# EAGLE board RM Turing_mini_expander (EAGLE 7.5.0)
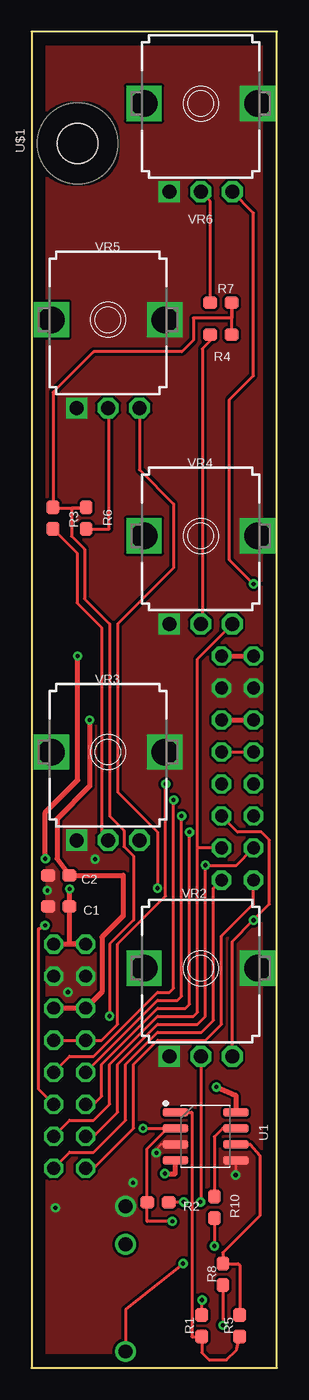
[diagram p0: board, top side]
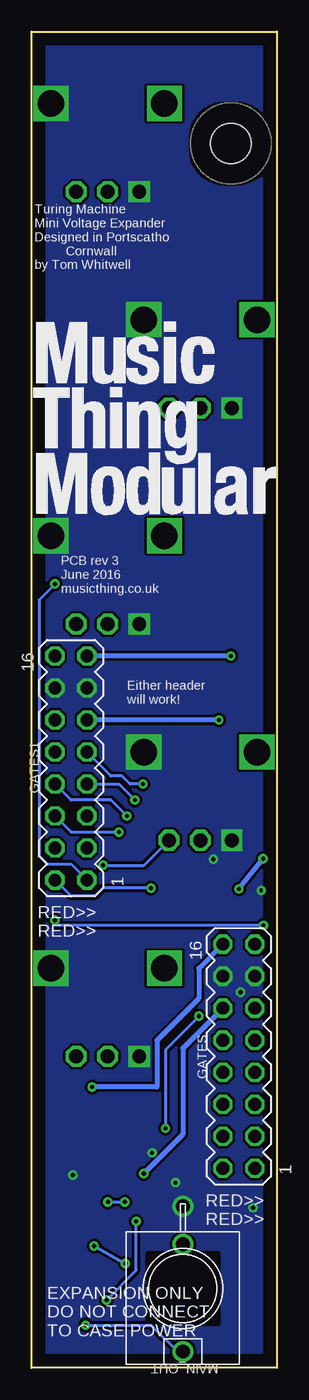
[diagram p1: board, bottom side, seen from below]

Size 19.5 x 106 mm. Coordinates in mm from the lower left corner, seen from the top.
Outline: 0,0 19.5,0 19.5,106 0,106 0,0
Outline: 0,0 0,0
Copper layers (1*16): Top 0.035mm / dielectric 0.2mm / Bottom 0.018mm
Design rules "default *": minimum track width 10mil, minimum drill 0.61mm, track to track 8mil, track to pad 8mil, pad to pad 8mil, via to via 8mil, smd to smd 8mil, copper to edge 40mil, drill to drill 8mil, minimum pad ring 0mil, minimum via ring 8mil, stop-mask expansion 2mil, vias tented up to drill 13mil, thermal gap 10mil
Net classes: 0 default: width 0.203 mm, clearance 0.152 mm, clearance 0.152 mm to class 1, clearance 0.152 mm to class 2; 1 power: width 0.203 mm, clearance 0.152 mm, clearance 0.152 mm to class 0, clearance 0.152 mm to class 2; 2 ground: width 0.203 mm, clearance 0.152 mm, clearance 0.152 mm to class 0, clearance 0.152 mm to class 1

## Footprints (pad centres in the part's own frame; a part is rotated, then mirrored left to right if it is on the bottom)
CAP_0603 = smd 1.1 x 1: 1 -0.85,0; 2 0.85,0
MA08-2 = drill 1.016 pad 1.524 octagon: 1 -8.89,-1.27; 2 -8.89,1.27; 3 -6.35,-1.27; 4 -6.35,1.27; 5 -3.81,-1.27; 6 -3.81,1.27; 7 -1.27,-1.27; 8 -1.27,1.27; 9 1.27,-1.27; 10 1.27,1.27; 11 3.81,-1.27; 12 3.81,1.27; 13 6.35,-1.27; 14 6.35,1.27; 15 8.89,-1.27; 16 8.89,1.27
WQP-PJ301M-12_JACK = drill 1.1 pad 1.65: P$1_TIP 0,5; P$2_SWITCH 0,-3.5; P$3_SLEEVE 0,-6.5
RES_0603 = smd 1.1 x 1: 1 -0.85,0; 2 0.85,0
SOIC8P127_490X600X175L83X41N_AD8 = smd 0.66 x 2: 1 -1.905,-2.405; 2 -0.635,-2.405; 3 0.635,-2.405; 4 1.905,-2.405; 5 1.905,2.405; 6 0.635,2.405; 7 -0.635,2.405; 8 -1.905,2.405
MOUNTING_HOLE = hole 3.2: 0,0
9MM_SNAP-IN_POT = drill 1.1 pad 1.676 square: 1 -2.5,-7 | drill 1.1 pad 1.676 octagon: 2 0,-7; 3 2.5,-7 | drill 2.1 pad 2.8 square: CHASSIS1 -4.5,0; CHASSIS2 4.5,0
9MM_SNAP-IN_POT_VR3 = drill 1.1 pad 1.676 square: 1 -2.5,-7 | drill 1.1 pad 1.676 octagon: 2 0,-7; 3 2.5,-7 | drill 2.1 pad 2.8 square: CHASSIS1 -4.5,0; CHASSIS2 4.5,0

## Placement (x,y rotation side)
C1  100n  [CAP_0603]  2.18,36.61 180 top
C2  100n  [CAP_0603]  2.18,39.07 180 top
GATES  MA08-2  [MA08-2]  3.03,24.73 90 bottom
GATES1  MA08-2  [MA08-2]  16.37,47.59 90 bottom
MAIN_OUT  THONKICONNNEW  [WQP-PJ301M-12_JACK]  7.48,6.31 180 bottom
R1  10k  [RES_0603]  13.52,3.33 90 top
R2  10k  [RES_0603]  10.04,13.14 180 top
R3  10k  [RES_0603]  1.71,67.41 90 top
R4  10k  [RES_0603]  15.05,81.96 0 top
R5  10k  [RES_0603]  16.54,3.33 90 top
R6  10k  [RES_0603]  4.34,67.41 270 top
R7  10k  [RES_0603]  15.05,84.5 180 top
R8  10k  [RES_0603]  15.2,7.42 90 top
R10  1k  [RES_0603]  14.52,12.73 90 top
U1  TL072_  [SOIC8P127_490X600X175L83X41N_AD8]  13.83,18.38 270 top
U$1  U$1  [MOUNTING_HOLE]  3.66,97.12 90 top
VR2  9MM_SNAP-IN_POT  [9MM_SNAP-IN_POT]  13.44,31.71 0 top
VR3  9MM_SNAP-IN_POT  [9MM_SNAP-IN_POT_VR3]  6.08,48.86 0 top
VR4  9MM_SNAP-IN_POT  [9MM_SNAP-IN_POT_VR3]  13.44,66 0 top
VR5  9MM_SNAP-IN_POT  [9MM_SNAP-IN_POT_VR3]  6.08,83.15 0 top
VR6  9MM_SNAP-IN_POT  [9MM_SNAP-IN_POT_VR3]  13.44,100.29 0 top

## Library data of the parts
C1 C2 = common; UNIQUE_NAME: CAP_0603
GATES GATES1 = common; OC_FARNELL: unknown; OC_NEWARK: unknown
MAIN_OUT U$1 VR2-VR6 = common
R1-R8 R10 = common; UNIQUE_NAME: RES_0603
U1 = common; DATASHEET: http://datasheets.diptrace.com/picaxe/picaxe_manual1.pdf; MANUFACTURER: Picaxe; UNIQUE_NAME: PICAXE_08_SOIC

## Nets
+12V [power]: C1.1 GATES1.15 GATES1.16 GATES.15 GATES.16 U1.8
-12V [power]: C2.1 GATES1.11 GATES1.12 GATES.11 GATES.12 U1.4
CLOCK: GATES1.9 GATES1.10 GATES.9 GATES.10
GATE1: GATES1.1 GATES.1 VR6.3
GATE2: GATES1.2 GATES.2 VR5.3
GATE3: GATES1.3 GATES.3 VR4.3
GATE4: GATES1.4 GATES.4 VR3.3
GATE5: GATES1.5 GATES.5 VR2.3
GATE6: GATES1.6 GATES.6
GATE7: GATES1.7 GATES.7
GATE8: GATES1.8 GATES.8
GND [ground]: C1.2 C2.2 GATES1.13 GATES1.14 GATES.13 GATES.14 MAIN_OUT.P$3_SLEEVE U1.3 U1.5 VR2.1 VR2.CHASSIS2 VR3.1 VR3.CHASSIS2 VR4.1 VR4.CHASSIS2 VR5.1 VR5.CHASSIS2 VR6.1 VR6.CHASSIS2
N$2: R2.1 VR2.2
N$4: R5.2 R8.2 U1.6
N$5: MAIN_OUT.P$1_TIP R8.1 R10.1
N$6: R10.2 U1.7
N$15: R1.1 R5.1 U1.1
N$16: R3.1 VR3.2
N$19: R4.1 VR4.2
N$20: R6.2 VR5.2
N$21: R7.2 VR6.2
SUM: R1.2 R2.2 R3.2 R4.2 R6.1 R7.1 U1.2

## Tracks (layer width: path | path; a pad name or v marks a point on that pad's centre or on a via)
+12V  (via drill 0.33 pad 0.64)
  Top 0.406: GATES.15 GATES.16 | GATES.16 | GATES1.15 GATES1.16 | GATES1.16 | v3.03,37.99 C1.1 3.03,33.62 GATES.16 | v1.1,40.39 1.1,44.07 3.66,46.63 v3.66,56.48 | v14.68,22.29 16.23,21.64 U1.8
  Bottom 0.406: v3.66,56.48 GATES1.15 | GATES1.15 | v3.03,37.99 v1.1,40.39 | GATES.16 6.2,31.71 6.2,29.33 9.54,25.99 9.54,22.29 v14.68,22.29
-12V  (via drill 0.33 pad 0.64)
  Top 0.406: v4.62,51.39 4.62,46.15 2.02,43.55 2.02,40.38 C2.1 7.27,39.07 7.27,35.85 5.59,34.17 5.59,29.82 GATES.12 GATES.11 | GATES1.11 GATES1.12 | GATES1.12 | v10.59,15.42 11.42,15.42 U1.4 | GATES.11
  Bottom 0.406: v4.62,51.39 GATES1.11 | GATES1.11 | GATES.12 7.48,25.36 7.48,18.53 v10.59,15.42
CLOCK  (via drill 0.33 pad 0.64)
  Top 0.254: GATES.9 GATES.10 | GATES.10 | GATES1.9 GATES1.10 | GATES1.10 | GATES.10 5.57,26 6.84,27.27 6.84,33.62 10.65,37.42 v10.65,46.31
  Bottom 0.254: v10.65,46.31 11.67,46.31 12.3,46.95 13.19,46.95 GATES1.9
GATE1  (via drill 0.33 pad 0.64)
  Top 0.254: GATES.1 3.03,17.11 4.94,17.11 7.48,19.64 7.48,24.09 10.02,26.63 13.51,26.63 14.46,27.58 14.46,38.06 GATES1.1 | v17.63,62.19 15.73,64.09 15.73,76.8 17.63,78.7 17.63,91.6 VR6.3
  Bottom 0.254: v17.63,62.19 18.91,60.92 18.91,40.6 18.27,39.97 16.37,39.97 GATES1.1
GATE2  (via drill 0.33 pad 0.64)
  Top 0.254: VR5.3 8.58,71.25 11.28,68.54 11.28,63.46 6.84,59.02 6.84,45.68 10.02,42.51 v10.02,38.06 | GATES.2 4.94,15.84 8.11,19.01 8.11,24.09 10.02,26 13.83,26 15.09,27.27 15.09,34.25 17.63,36.79 GATES1.2
  Bottom 0.254: v10.02,38.06 13.83,38.06 14.46,37.42 16.37,37.42 GATES1.2
GATE3
  Top 0.254: GATES.3 3.03,19.64 4.94,19.64 6.2,20.91 6.2,24.09 10.02,27.9 12.87,27.9 13.19,28.22 13.19,41.23 | 13.19,41.23 13.19,56.25 VR4.3 | GATES1.3 13.19,41.23 | 13.19,41.23
GATE4  (via drill 0.33 pad 0.64)
  Top 0.254: GATES1.4 16.27,39.87 v13.81,39.87 13.81,27.88 13.19,27.27 10.02,27.27 6.84,24.09 6.84,20.28 4.94,18.38 GATES.4
  Bottom 0.254: v13.81,39.87 10.56,39.87 VR3.3
GATE5  (via drill 0.33 pad 0.64)
  Top 0.254: VR2.3 15.94,33.83 v17.63,35.52 18.91,36.79 18.91,41.87 18.27,42.51 16.37,42.51 GATES1.5 | GATES.5 0.56,22.11 0.56,34.84 v1.08,35.11
  Bottom 0.254: v1.08,35.11 17.63,35.11 v17.63,35.52
GATE6  (via drill 0.33 pad 0.64)
  Top 0.254: GATES.6 4.94,20.91 5.57,21.55 5.57,24.09 10.02,28.54 12.24,28.54 12.55,28.85 v12.55,42.51
  Bottom 0.254: GATES1.6 16.37,42.51 v12.55,42.51
GATE7  (via drill 0.33 pad 0.64)
  Top 0.254: GATES.7 3.03,24.73 4.94,24.73 10.02,29.8 10.97,29.8 11.28,30.12 v11.28,45.05
  Bottom 0.254: GATES1.7 12.55,46.31 v11.28,45.05
GATE8  (via drill 0.33 pad 0.64)
  Top 0.254: GATES.8 10.02,29.17 11.6,29.17 11.92,29.49 v11.92,43.77
  Bottom 0.254: v11.92,43.77 13.19,45.05 16.37,45.05 GATES1.8
GND  (via drill 0.3 pad 0.6, 0.33 pad 0.64)
  Top 0.203: U1.3 10.3,17.74 9.92,17.36 v9.92,17.06 | U1.5 v16.23,15.3 v16.22,15.3
  other vias: 1.26,37.89 1.9,12.7 8.07,14.7 2.9,29.81 5.05,40.35
  pour Bottom (isolate 0.178): 0.36,0.36 19.14,0.36 19.14,105.64 0.36,105.64
  pour Top (isolate 0.178): 0.36,0.36 19.14,0.36 19.14,105.64 0.36,105.64
N$2  (via drill 0.33 pad 0.64)
  Top 0.254: VR2.2 13.44,13.17 v13.43,13.17 | v12.09,13.17 12.09,13.14 R2.1
  Bottom 0.254: v13.43,13.17 v12.09,13.17
N$4
  Top 0.254: U1.6 17.36,17.74 18.13,16.87 18.13,12.07 15.2,9.14 R8.2 16.41,8.27 16.54,8.14 R5.2
N$5  (via drill 0.33 pad 0.64)
  Top 0.254: R8.1 v15.2,3.4 | R10.1 v14.52,9.68 | v12.04,8.28 7.48,4.64 MAIN_OUT.P$1_TIP
  Bottom 0.254: v15.2,3.4 10,3.4 7.92,1.31 MAIN_OUT.P$1_TIP | v14.52,9.68 v12.04,8.28
N$6
  Top 0.254: U1.7 15.19,19.01 14.52,18.34 R10.2
N$15
  Top 0.254: R5.1 16.29,1.58 16.29,1.45 15.48,0.64 14.09,0.64 13.52,1.22 R1.1 12.73,2.48 12.73,20.28 U1.1
N$16
  Top 0.254: R3.1 3.62,64.65 3.62,60.68 5.57,58.73 5.57,42.36 VR3.2
N$19
  Top 0.254: R4.1 14.2,81.49 13.56,80.85 13.56,59.36 13.44,59.24 VR4.2
N$20
  Top 0.254: R6.2 6.16,66.56 6.16,75.79 6.08,75.87 VR5.2
N$21
  Top 0.254: R7.2 14.2,92.53 VR6.2
SUM  (via drill 0.33 pad 0.64)
  Top 0.254: R4.2 R7.1 | R7.1 | v8.85,19.01 U1.2 11.28,19.01 11.24,19.05 10.84,19.05 9.19,17.4 R2.2 9.19,11.62 v11.19,11.62 | R1.2 13.52,5.39 v13.55,5.39 | v6.2,27.9 6.2,33.62 8.11,35.52 8.11,40.6 7.35,41.36 7.35,42.63 6.2,43.77 6.2,59.02 4.22,61 4.22,64.93 3.19,65.97 3.19,68.2 4.34,68.2 R6.1 4.34,68.19 1.71,68.19 R3.2 1.71,77.38 4.94,80.6 11.94,80.6 12.86,81.52 12.86,83.27 15.9,83.27 R7.1
  Bottom 0.254: v6.2,27.9 8.85,25.25 v8.85,19.01 | v13.55,5.39 11.19,7.75 v11.19,11.62

## Text on the board
tPlace: U$1 | VR6 | VR5 | R7 | R4 | VR4 | R6 | R3 | VR3 | C2 | VR2 | C1 | U1 | R2 | R10 | R8 | R1 | R5
bPlace: Turing Machine / Mini Voltage Expander / Designed in Portscatho / Cornwall / by Tom Whitwell | PCB rev 3 / June 2016 / musicthing.co.uk | Either header / will work! | GATES1 | RED>> / RED>> | GATES | RED>> / RED>> | EXPANSION ONLY / DO NOT CONNECT / TO CASE POWER | MAIN_OUT
tDocu: VR6 | U$1 | VR5 | R7 | R4 | VR4 | R6 | R3 | VR3 | C2 | VR2 | C1 | U1 | R2 | R10 | R8 | R1 | R5
bDocu: GATES1 | GATES | MAIN_OUT